# Altium PCB JHZ-E01S-HW-Sensor-H-I-S0.1.PcbDoc
Units mm, origin at the board's own origin, x right, y up, seen from the top; angles counter-clockwise.
Board outline 27 x 13 mm, 2 copper layers (Top Layer, Bottom Layer); 6 components, 6 nets, 20 pads, 4 vias.
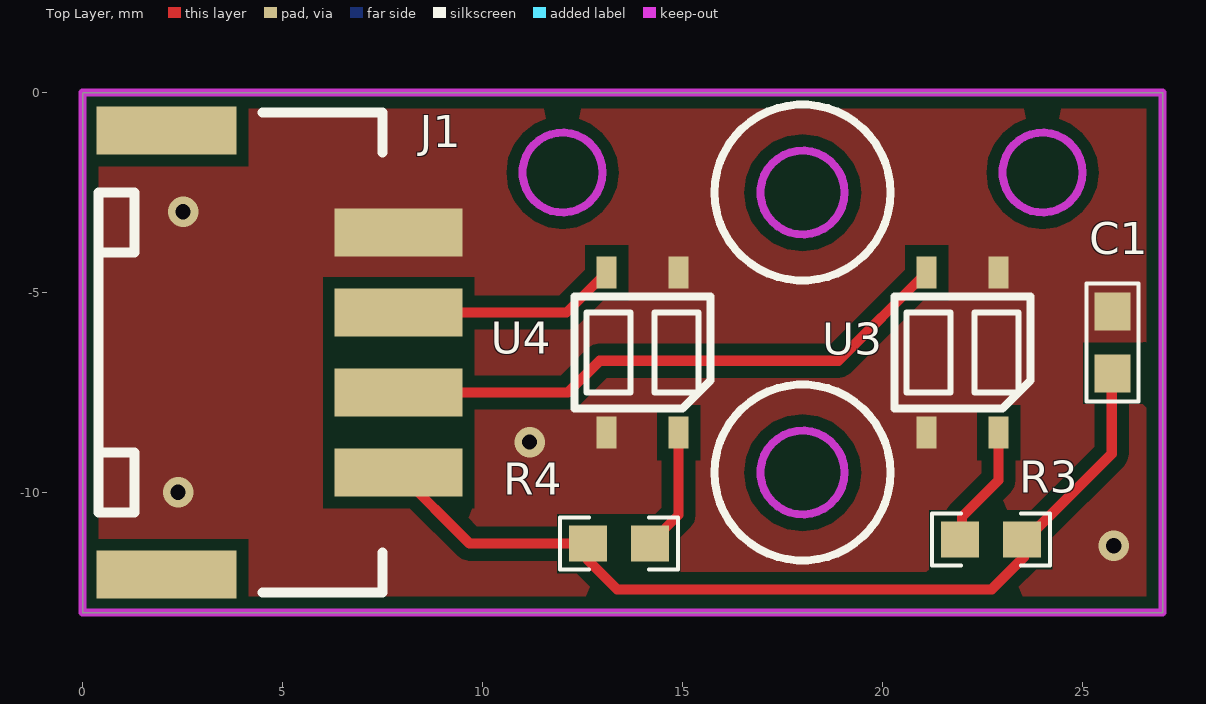
[diagram p0: Top Layer view]
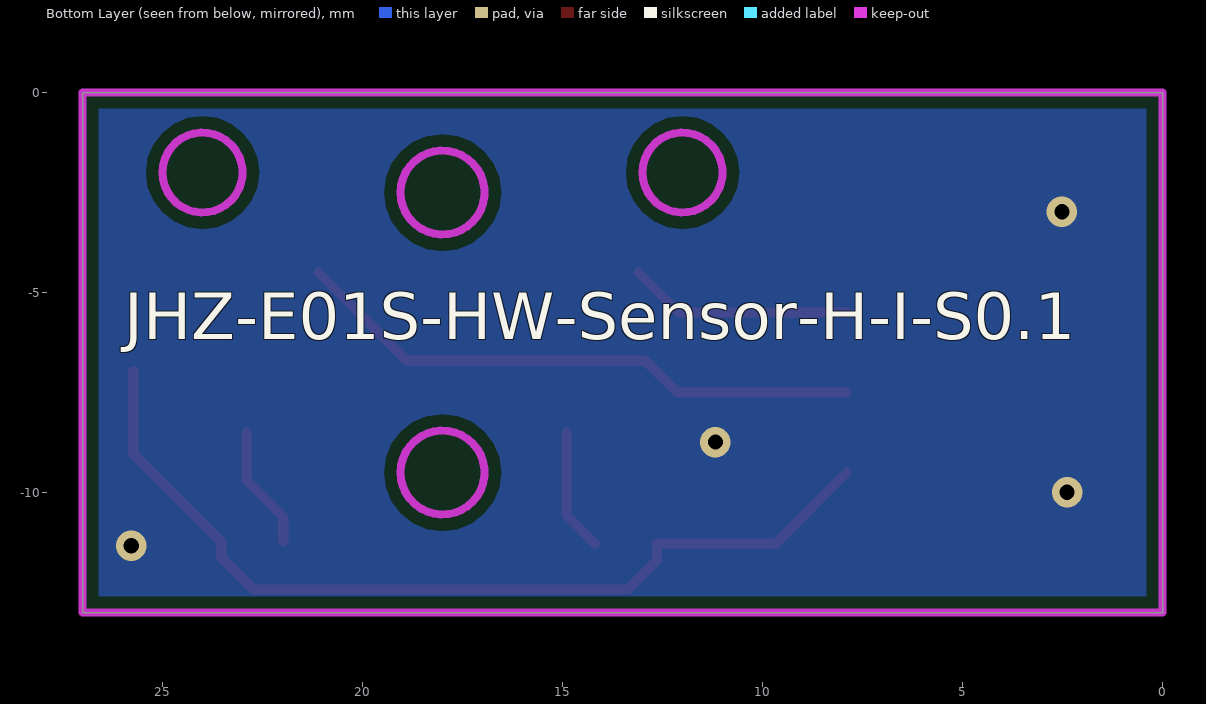
[diagram p1: Bottom Layer view, seen from below]

## Layer stack, top to bottom
Top Layer: signal copper 0.0356
Dielectric: dielectric 0.32, FR-4, Dk 4.8
Bottom Layer: signal copper 0.0356

## Board outline
0,-13 0,0 27,0 27,-13

## Design rules (kind name [scope] priority, off if disabled: settings)
Clearance [All] p1: gap=0.3
FabricationTestpoint [(IsPad And (OnTopLayer Or OnBottomLayer))] p1: side=3 testpointundercomponent=TRUE minsize=1.016 maxsize=2.54 preferedsize=1.524 minholesize=0 maxholesize=1.016 preferedholesize=0.813 testpointgrid=0.025 allowsidetop=TRUE allowsidebottom=TRUE usegrid=TRUE gridtolerance=0
PlaneConnect [All] p1: planeconnectstyle=Direct reliefexpansion=0.508 reliefentries=4 reliefconductorwidth=0.254 reliefairgap=0.254
PolygonConnect [All] p1: connectstyle=Direct reliefconductorwidth=0.254 reliefentries=4 polygonreliefangle="90 Angle"
RoutingVias [All] p1: holewidth=0.3 width=0.6 viastyle="Through Hole" minholewidth=0.3 minwidth=0.6 maxholewidth=0.3 maxwidth=0.6
SilkscreenOverComponentPads [All] p1: minsilkscreentomaskgap=0
SolderMaskExpansion [All] p1: expansion=0.102
Width [All] p1: maxlimit=0.254 minlimit=0.254 preferedwidth=0.254
25 further rules are at their usual default settings.

## Components (designator, comment, footprint, x,y, rotation, side; value= is the part's Value field where it differs from the comment)
C1 "C0603" C0603_M1608 25.756,-6.248 r90 top
J1 "PH-AWB-4P" PH-AWB-4P 5,-6.5 r90 top
R3 "R0603" R0603_M1608 22.708,-11.176 r0 top
R4 "R0603" R0603_M1608 13.411,-11.278 r180 top
U3 "ITR8307-R" ITR8307 22,-6.5 r90 top
U4 "ITR8307-L" ITR8307 14,-6.5 r90 top

## Footprints (in the part's own frame and the unit in brackets; to place one, negate y for a bottom-side part, rotate by r counter-clockwise, add the part's x,y. Pads: shape width x height; smd on the part's side, far side on the other; paste and mask are expansions set on the pad)
C0603_M1608 [mm] "Chip Capacitor, 2-Leads, Body 1.6x0.8mm, IPC Med"
  rect 0.95x0.9 smd: 1(-0.775,0) 2(0.775,0)
  silkscreen extent -1.48,-0.65 1.48,0.65
ITR8307 [mm]
  rect 0.8x0.5 smd: 1(2,-0.9) 2(-2,-0.9) 3(2,0.9) 4(-2,0.9)
  silkscreen extent -1.4,-1.7 1.4,1.7
PH-AWB-4P [mm]
  rect 1.2x3.5 smd: 0(-5.55,2.9) 0(5.55,2.9)
  rect 1.2x3.2 smd: 1(3,-2.9) 2(1,-2.9) 3(-1,-2.9) 4(-3,-2.9)
  silkscreen extent -6,-2.5 6,4.6
R0603_M1608 [mm]
  rect 0.95x0.9 smd: 1(-0.775,0) 2(0.775,0)
  silkscreen extent -1.48,-0.65 1.48,0.65

## Part data
C1: library part Cap, "Capacitor"
J1: library part XH2.54-4P
R3 R4: library part Res1
U3 U4: library part Compo

## Via types
v1: diameter 0.762, hole 0.381, Top Layer to Bottom Layer, tented both sides, 4 vias

## Nets (pads, with @x,y where several pads share a name; then routed paths per layer and width w, separated by ;. In a path a pad name is that pad's centre, name@x,y a point inside that pad or via, vN(x,y) a via of type N, cw(c..) or ccw(c..) an arc to the next point about the centre after c; other vN are vias at no path point)
GND: C1.2 J1.1 U3.1 U3.4 U4.1 U4.4
  other v1: 25.781,-11.328 2.388,-9.992 11.176,-8.738 2.515,-2.982
NetJ1_2: J1.2 U4.3 | length 5.6
  Top Layer w0.254: J1.2 12.1,-5.5 U4.3
NetJ1_3: J1.3 U3.3 | length 14.4
  Top Layer w0.254: J1.3 12.134,-7.5 12.929,-6.706 18.894,-6.706 U3.3
NetR3_1: R3.1 U3.2 | length 3.1
  Top Layer w0.254: R3.1@21.983,-11.227 21.983,-10.611 22.9,-9.695 U3.2
NetR4_1: R4.1 U4.2 | length 3.1
  Top Layer w0.254: R4.1 14.9,-10.564 U4.2
VDD: C1.1 J1.4 R3.2 R4.2 | length 23
  Top Layer w0.254: J1.4 9.678,-11.278 R4.2 12.636,-11.696 13.36,-12.421 22.733,-12.421 23.533,-11.62 23.533,-11.227 25.73,-9.03 C1.1@25.73,-6.973
pads on no net: J1.0

## Polygon pours and split planes (outlines as drawn)
GND on Bottom Layer "Top Layer-GND" (solid, remove dead copper, pour order 4): -0.559,0.508 -0.559,-13.665 -0.457,-13.767 -0.381,-13.691 27.864,-13.691 27.864,0.229 27.584,0.508
GND on Top Layer "Top Layer-No Net" (solid, remove dead copper, pour order 2): -0.838,0.762 -0.864,0.737 -0.864,-13.741 27.864,-13.741 28.169,-14.046 27.635,-13.513 27.635,1.041

## Keep-outs
Keep-Out Layer:
  circle w0.2: c12,-2 r1
  circle w0.2: c24,-2 r1
  circle w0.2: c18,-9.5 r1.05
  circle w0.2: c18,-2.5 r1.05
  lines w0.2: 0,-13 27,-13 27,0 0,0 0,-13

## Silkscreen, mask and mechanical layers (free items; w line width, h text height)
Top Overlay:
  circle w0.2: c18,-2.5 r2.2
  circle w0.2: c18,-9.5 r2.2
Bottom Overlay:
  text "JHZ-E01S-HW-Sensor-H-I-S0.1" at 25.959,-6.553 h2